# Altium PCB uarttors485_1codeic.PcbDoc
Units mil, origin at the board's own origin, x right, y up, seen from the top; angles counter-clockwise.
Board outline 2086.61 x 1633.86 mil, 2 copper layers (Top Layer, Bottom Layer); 19 components, 11 nets, 50 pads, 0 vias.
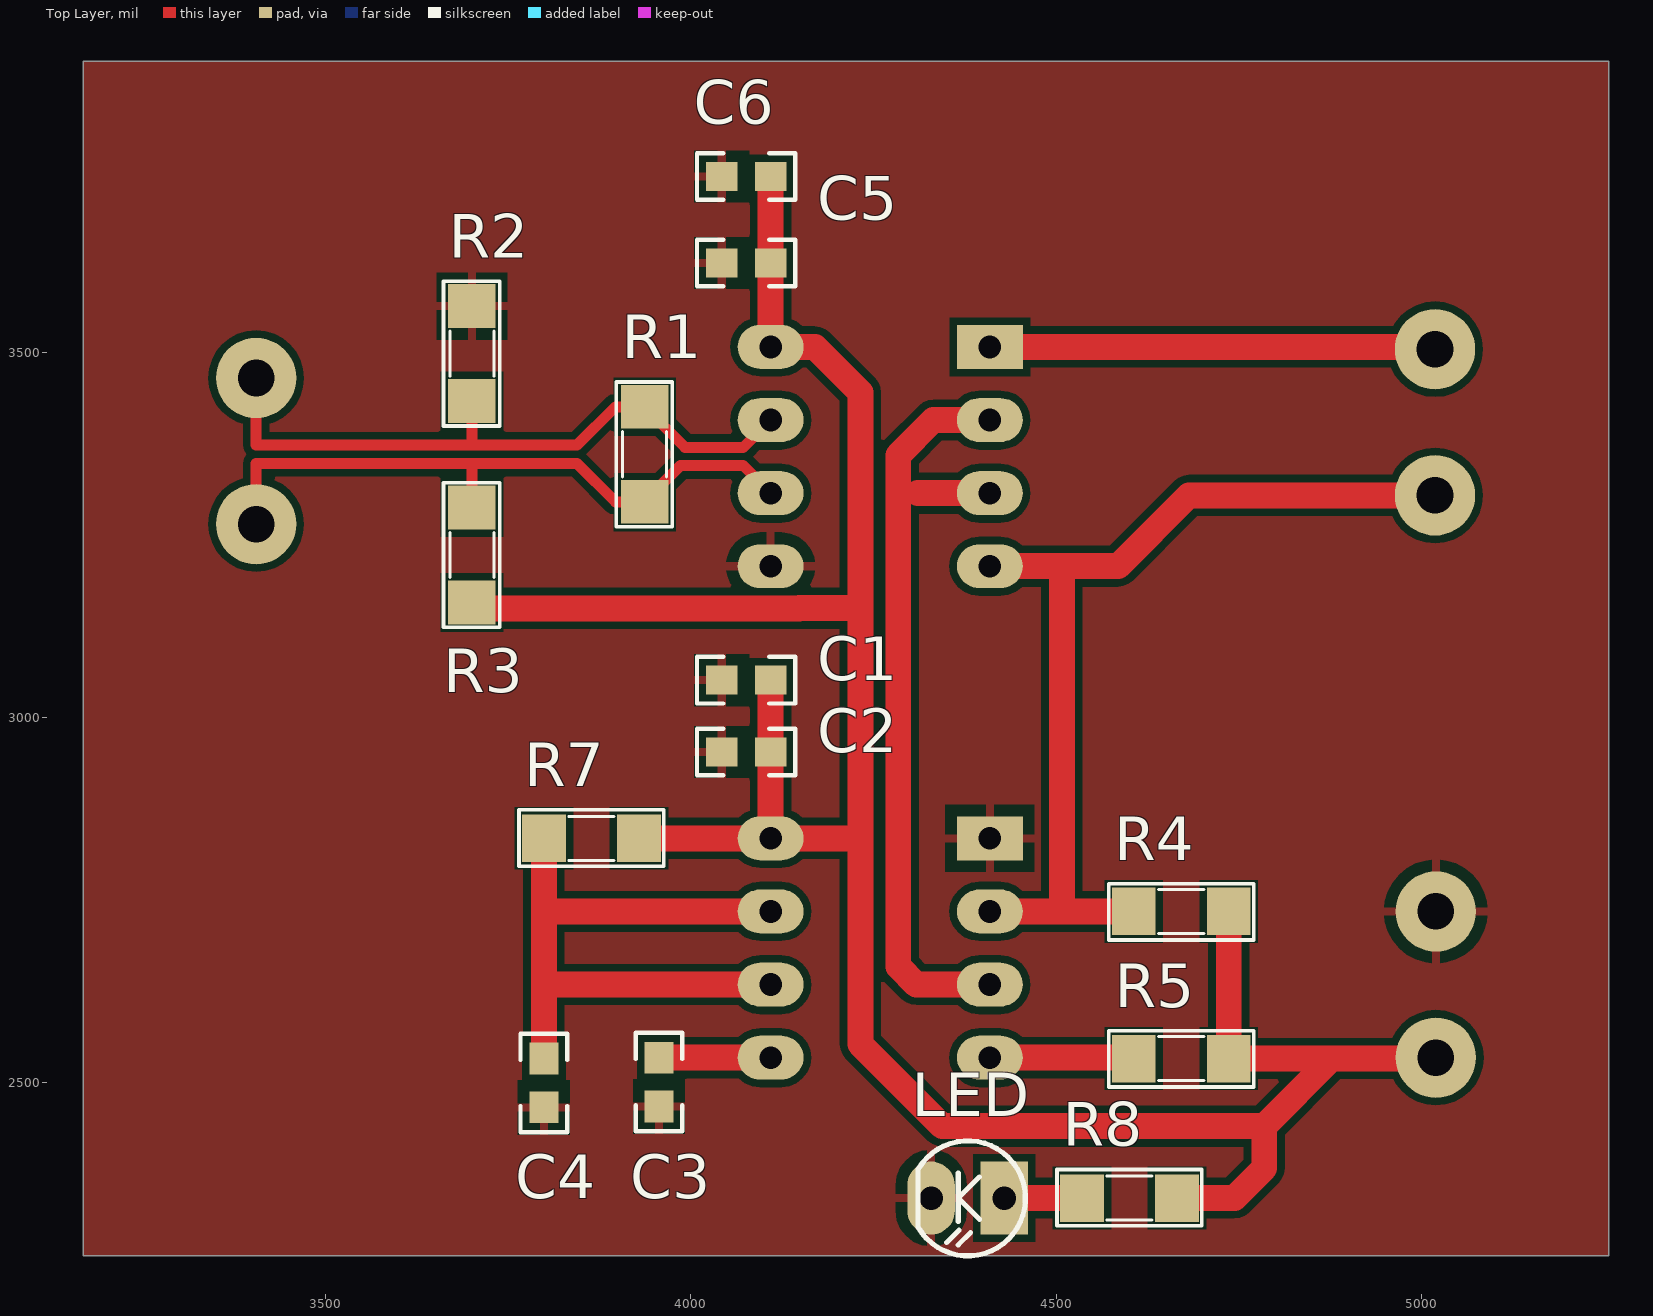
[diagram p0: Top Layer view]
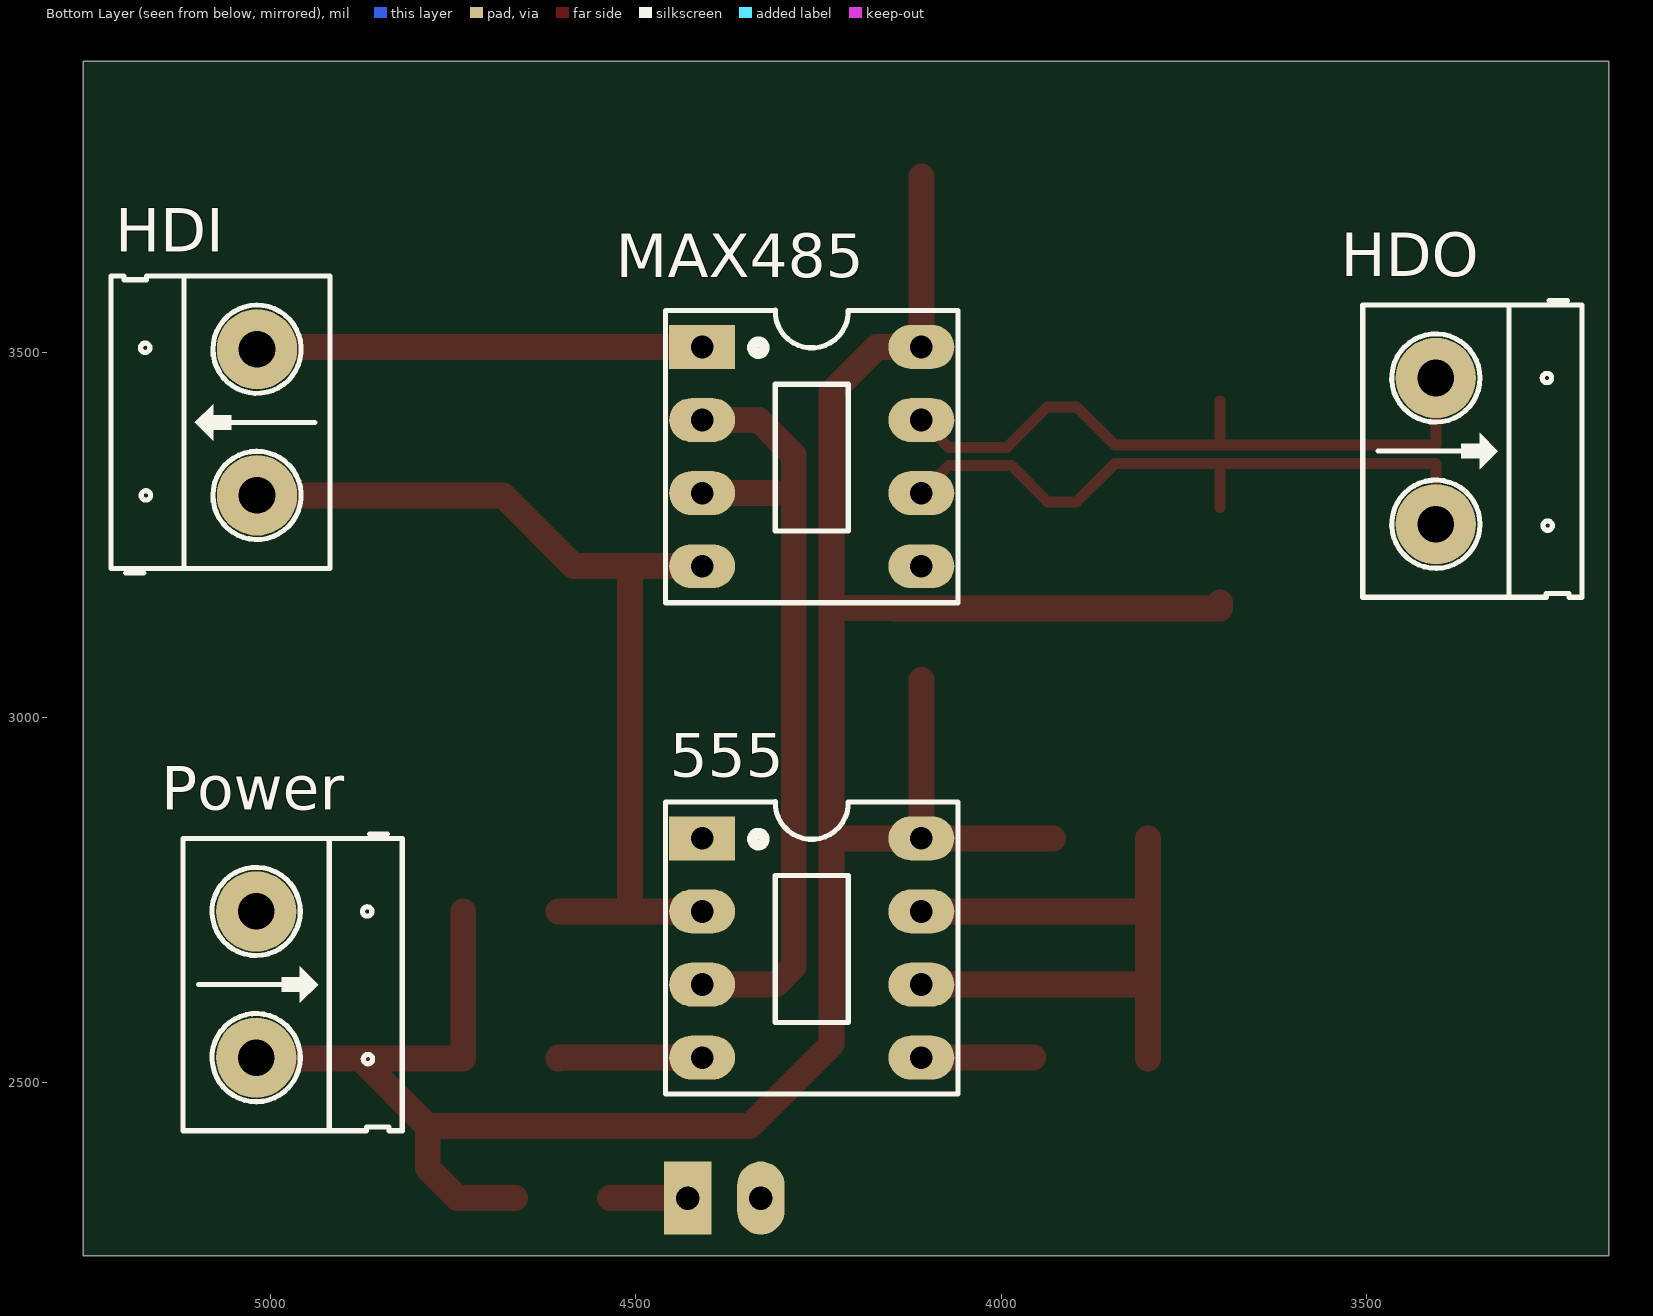
[diagram p1: Bottom Layer view, seen from below]
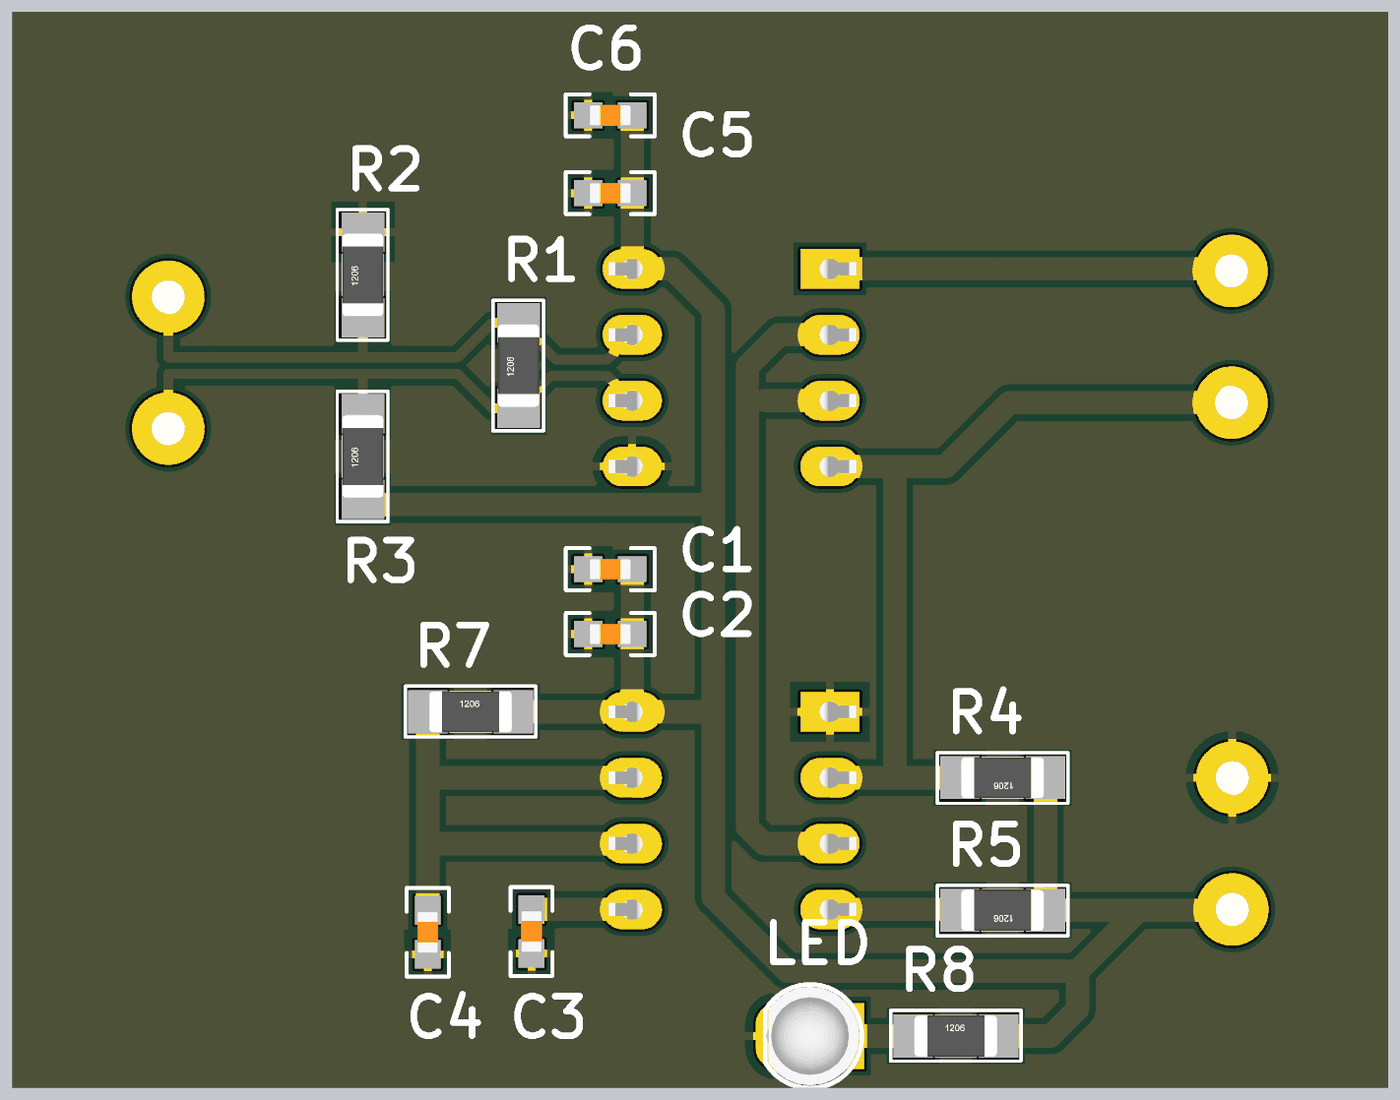
[diagram p2: 3D render of the assembled board from above, using the file's embedded part models]
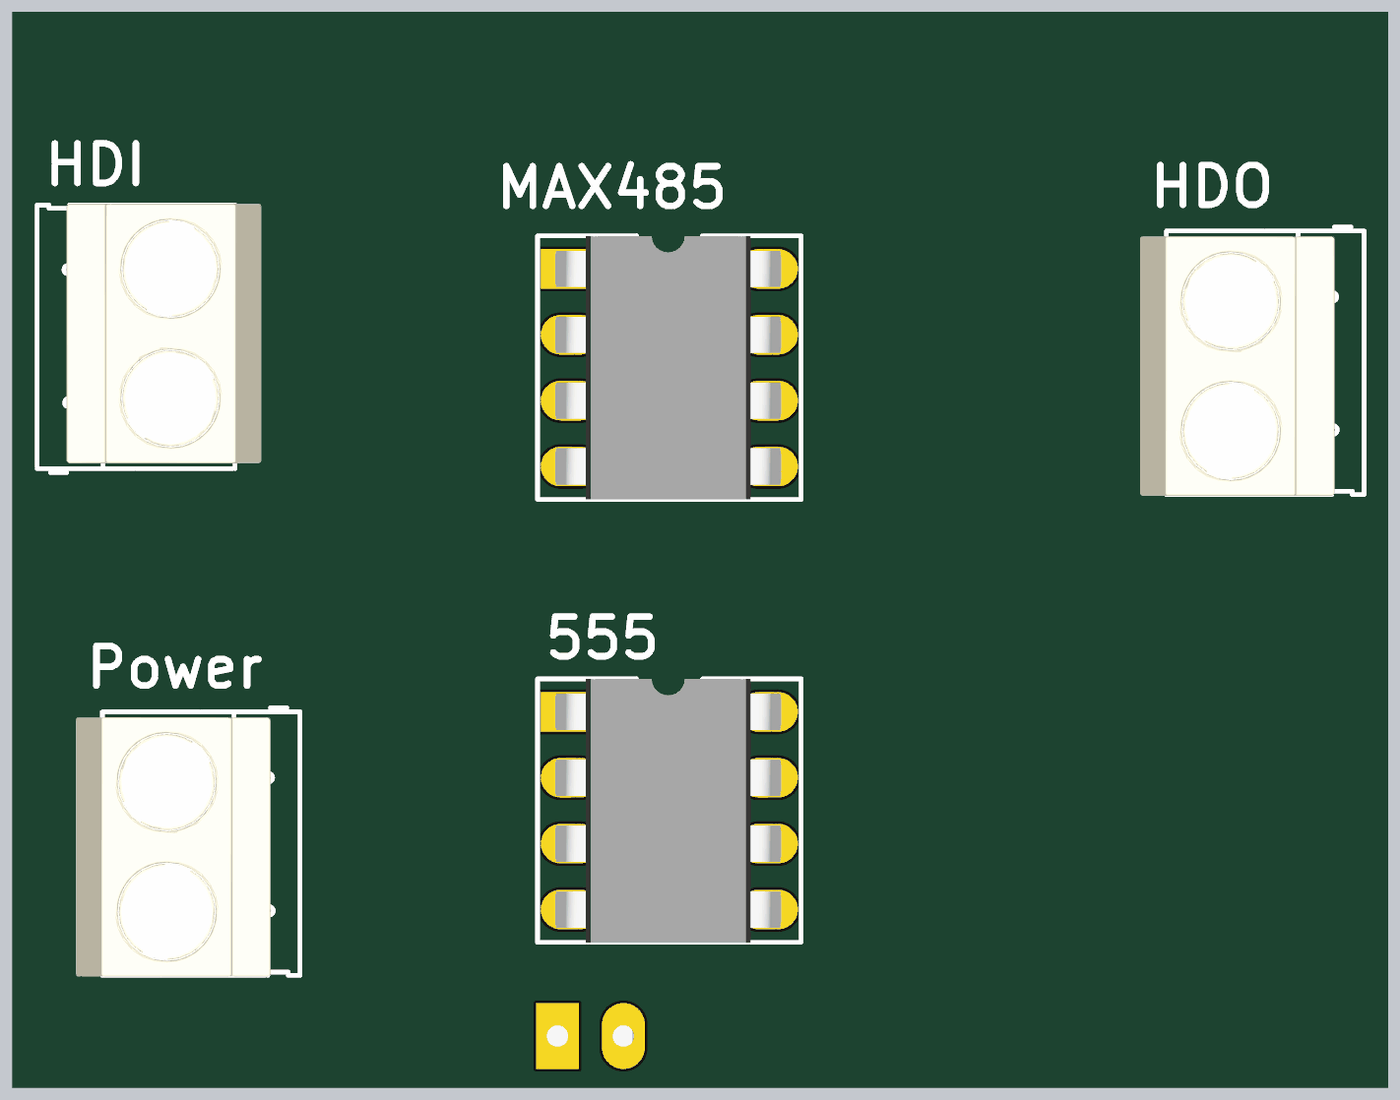
[diagram p3: 3D render of the assembled board from below, using the file's embedded part models]

## Layer stack, top to bottom
Top Solder: solder mask 0.4, Solder Resist, Dk 3.5
Top Layer: signal copper 1.4
Dielectric 1: dielectric 12.6, FR-4, Dk 4.8
Bottom Layer: signal copper 1.4
Bottom Solder: solder mask 0.4, Solder Resist, Dk 3.5

## Board outline
3169.29,3897.64 5255.91,3897.64 5255.91,2263.78 3169.29,2263.78

## Design rules (kind name [scope] priority, off if disabled: settings)
Clearance Clearance_4 [InNamedPolygon('Top Layer-No Net')] p1: gap=10 ignorepadtopadclearanceinfootprint=FALSE except(0: Arc-Hole Track-Hole SMDPad-Hole THPad-Hole Via-Hole Fill-Hole Poly-Hole Region-Hole Text-Hole)
Clearance Clearance_3 [InNamedPolygon('Top Layer-No Net')] p2: gap=10 ignorepadtopadclearanceinfootprint=FALSE except(0: Arc-Hole Track-Hole SMDPad-Hole THPad-Hole Via-Hole Fill-Hole Poly-Hole Region-Hole Text-Hole; 20: Arc-Fill Arc-Poly Arc-Region Track-Fill Track-Poly Track-Region THPad-Fill THPad-Poly THPad-Region)
Clearance Clearance_2 [InNamedPolygon('Top Layer-No Net')] p3: gap=10 ignorepadtopadclearanceinfootprint=FALSE except(0: Arc-Hole Track-Hole SMDPad-Hole THPad-Hole Via-Hole Fill-Hole Poly-Hole Region-Hole Text-Hole; 20: Arc-Fill Arc-Poly Arc-Region Track-Fill Track-Poly Track-Region THPad-Fill THPad-Poly THPad-Region)
Clearance Clearance_1 [InNamedPolygon('Top Layer-No Net')] p4: gap=10 ignorepadtopadclearanceinfootprint=FALSE except(0: Arc-Hole Track-Hole SMDPad-Hole THPad-Hole Via-Hole Fill-Hole Poly-Hole Region-Hole Text-Hole; 20: Arc-Fill Arc-Poly Arc-Region Track-Fill Track-Poly Track-Region THPad-Fill THPad-Poly THPad-Region)
Clearance [All] p5: gap=10 ignorepadtopadclearanceinfootprint=FALSE except(0: Arc-Hole Track-Hole SMDPad-Hole THPad-Hole Via-Hole Fill-Hole Poly-Hole Region-Hole Text-Hole; 20: Arc-Fill Arc-Poly Arc-Region Track-Fill Track-Poly Track-Region THPad-Fill THPad-Poly THPad-Region)
DiffPairsRouting [All] p1: maxlimit=10 minlimit=10 mostfreqgap=10 toplayer_minwidth=15 toplayer_maxwidth=15 toplayer_prefwidth=15 bottomlayer_minwidth=15 bottomlayer_maxwidth=15 bottomlayer_prefwidth=15 maxuncoupledlength=500
PolygonConnect PolygonConnect_5 [All vs IsNamedPolygon('Top Layer-No Net')] p1: connectstyle=Relief reliefconductorwidth=11.81 reliefentries=4 polygonreliefangle="90 Angle" airgapwidth=15.75
PolygonConnect PolygonConnect_4 [All vs IsNamedPolygon('Top Layer-No Net')] p2: connectstyle=Relief reliefconductorwidth=10 reliefentries=4 polygonreliefangle="90 Angle" airgapwidth=11.81
PolygonConnect PolygonConnect_3 [All vs IsNamedPolygon('Top Layer-No Net')] p3: connectstyle=Relief reliefconductorwidth=11.81 reliefentries=4 polygonreliefangle="90 Angle" airgapwidth=15.75
PolygonConnect PolygonConnect_2 [All vs IsNamedPolygon('Top Layer-No Net')] p4: connectstyle=Relief reliefconductorwidth=11.81 reliefentries=4 polygonreliefangle="90 Angle" airgapwidth=15.75
PolygonConnect PolygonConnect_1 [All vs IsNamedPolygon('Top Layer-No Net')] p5: connectstyle=Relief reliefconductorwidth=11.81 reliefentries=4 polygonreliefangle="90 Angle" airgapwidth=15.75
PolygonConnect [All] p6: connectstyle=Relief reliefconductorwidth=10 reliefentries=4 polygonreliefangle="90 Angle" airgapwidth=10
RoutingVias [All] p1: holewidth=28 width=50 viastyle="Through Hole" minholewidth=28 minwidth=50 maxholewidth=28 maxwidth=50
SolderMaskExpansion [All] p1: expansion=4
Width [All] p1: maxlimit=43.31 minlimit=35.43 preferedwidth=39.37
29 further rules are at their usual default settings.

## Classes and differential pairs
differential pair class RS485DIFF: ""
component class uartto485: 555 C3 C4 HDI HDO MAX485 R1 R2 R3 R4 R5 R7
component class power: C1 C2 C5 C6 LED Power R8
differential pair "": +_P -_N

## Components (designator, comment, footprint, x,y, rotation, side; value= is the part's Value field where it differs from the comment)
555 "LM555" DIP8/W0.3 4409.45,2834.65 r270 bottom
C1 "22uF" "CAPC-0603 (1608)" 4075.98,3051.18 r0 top value=33p/50V
C2 "22uF" "CAPC-0603 (1608)" 4075.98,2952.76 r0 top value=33p/50V
C3 "10uF" "CAPC-0603 (1608)" 3956.69,2501.18 r90 top value=33p/50V
C4 "0.01uF" "CAPC-0603 (1608)" 3799.21,2500 r90 top value=33p/50V
C5 "22uF" "CAPC-0603 (1608)" 4075.98,3622.05 r0 top value=33p/50V
C6 "22uF" "CAPC-0603 (1608)" 4075.98,3740.16 r0 top value=33p/50V
HDI "Header 2_1" HED2 5018.5,3303.94 r90 bottom value="Header 2"
HDO "Header 2_1" HED2 3405.51,3464.57 r270 bottom value="Header 2"
LED "LED" LED-3 4429.13,2342.52 r180 top value="LED 3 ly Single Colour"
MAX485 "MAX485" DIP8/W0.3 4409.45,3507.09 r270 bottom
Power "Header 2_1" HED2 5019.69,2734.65 r270 bottom value="Header 2"
R1 "120" SM-RES-1206 3937.01,3295.2 r90 top value="R1/4W - 1K"
R2 "20k" SM-RES-1206 3700.79,3432.99 r90 top value="R1/4W - 1K"
R3 "20k" SM-RES-1206 3700.79,3157.4 r90 top value="R1/4W - 1K"
R4 "10k" SM-RES-1206 4736.3,2734.65 r180 top value="R1/4W - 1K"
R5 "1k" SM-RES-1206 4736.3,2533.46 r180 top value="R1/4W - 1K"
R7 "6.8k" SM-RES-1206 3799.21,2834.65 r0 top value="R1/4W - 1K"
R8 "1k" SM-RES-1206 4535.35,2342.52 r0 top value="R1/4W - 1K"

## Footprints (in the part's own frame and the unit in brackets; to place one, negate y for a bottom-side part, rotate by r counter-clockwise, add the part's x,y. Pads: shape width x height; smd on the part's side, far side on the other; paste and mask are expansions set on the pad)
"CAPC-0603 (1608)" [mm] "Resistor, Chip; 1.60 mm L X 0.80 mm W X 0.50 mm H body"
  rect 1.1x1 smd mask+0.1: 1(-0.85,0) 2(0.85,0)
  silkscreen extent -1.71,-0.81 1.71,0.81, body extent -0.8,-0.4 0.8,0.4, height 0.6
DIP8/W0.3 [mil] "8 PIN, W 300mil, Pin to pin 100mil"
  rect 60x90 hole 31: 1(0,0)
  oval 60x90 hole 31: 2(100,0) 3(200,0) 4(300,0) 5(300,300) 6(200,300) 7(100,300) 8(0,300)
  silkscreen extent -50,-50 350,350, body extent -50,-40 350,336, height 201
HED2 [mil] "Header 2, 2 pin, hight 300mil, Pin to Pin 200, Colour Green"
  round 110 hole 50: 1(0,0) 2(200,0)
  silkscreen extent -106,-100 300,200, body extent -92,-140 302,155, height 394
LED-3 [mil] "LED 2 PIN, 3ly Only colour"
  rect 65x100 hole 32: 1(0,0)
  oval 65x100 hole 32: 2(100,0)
  silkscreen extent -29,-78 118,79, body extent -25,-75 113,75, height 217
SM-RES-1206 [mil]
  rect 60x65 smd: 1(0,0) 2(130,0)
  silkscreen extent -34,-38 164,39, body extent 2,-31 128,32, height 40

## Part data
555: "Timer"
C1 C2 C3 C4 C5 C6: library part 0603N330J500CT, "CAP CER 33pF 50V 5%  0603", MPN="CL10C330JB8NNNC, 0603N330J500CT", Category=CAPACITOR, CompanyID=VT-01106, PinCount=2, Solder=SMT
HDI HDO Power: "Header, 2-Pin", Manufacturer="Generic Components", Class=Connector
LED: "LED Single colour Green and Red"
MAX485: "RS232 - RS485 (Same sn75176)"
R1 R2 R3 R4 R5 R7 R8: library part R, "Resistor 1/4W"

## Nets (pads, with @x,y where several pads share a name; then routed paths per layer and width w, separated by ;. In a path a pad name is that pad's centre, name@x,y a point inside that pad or via, vN(x,y) a via of type N, cw(c..) or ccw(c..) an arc to the next point about the centre after c; other vN are vias at no path point)
_N: HDO.1 MAX485.7 R1.2 R2.1 | length 916.4
  Top Layer w15: HDO.1 3405.51,3372.7 3700.79,3372.7 ; R2.1 3700.79,3372.7 ; MAX485.7 4071.95,3369.59 3992.62,3369.59 R1.2 3897.01,3425.2 3844.51,3372.7 3700.79,3372.7
_P: HDO.2 MAX485.6 R1.1 R3.2 | length 905.1
  Top Layer w15: HDO.2 3405.51,3347.7 3700.79,3347.7 ; R3.2 3700.79,3347.7 ; MAX485.6 4071.95,3344.59 3986.4,3344.59 R1.1 3897.01,3295.2 3844.51,3347.7 3700.79,3347.7
GND: 555.1 C1.1 C2.1 C3.1 C4.1 C5.1 C6.1 LED.2 MAX485.5 Power.1 R2.2
Net555_2: 555.2 HDI.1 MAX485.4 R4.2 | length 1318.5
  Top Layer w35.43: 555.2 4507.87,2734.65 ; MAX485.4 4507.87,3207.09 ; R4.2 4507.87,2734.65 ; HDI.1 4681.89,3303.94 4585.04,3207.09 4507.87,3207.09 ; 4507.87,2734.65 4507.87,3207.09
Net555_3: 555.3 MAX485.2 MAX485.3 | length 1078.8
  Top Layer w35.43: 4311.02,3307.09 MAX485.3 ; 555.3 4308.92,2634.65 4284.12,2659.44 4284.12,3358.93 4332.28,3407.09 MAX485.2
Net555_4: 555.4 R5.2 | length 197.3
  Top Layer w35.43: 555.4 4605.12,2534.65 R5.2
Net555_5: 555.5 C3.2 | length 152.8
  Top Layer w35.43: C3.2 555.5
Net555_6: 555.6 555.7 C4.2 R7.1 | length 923.6
  Top Layer w35.43: C4.2 3799.21,2637.8 ; R7.1 3799.21,2736.22 ; 555.6 3802.36,2634.65 3799.21,2637.8 ; 555.7 3800.79,2734.65 3799.21,2736.22 ; 3799.21,2637.8 3799.21,2736.22
NetHDI_2: HDI.2 MAX485.1 | length 610.4
  Top Layer w35.43: MAX485.1 5015.35,3507.09 HDI.2
NetLED_1: LED.1 R8.1 | length 106.2
  Top Layer w35.43: LED.1 R8.1
VCC: 555.8 C1.2 C2.2 C5.2 C6.2 MAX485.8 Power.2 R3.1 R4.1 R5.1 R7.2 R8.2 | length 3741.7
  Top Layer w35.43: R3.1 3700.79,3149.37 4148.36,3149.37 4148.59,3149.61 4232.28,3149.61 ; R7.2 555.8 ; C1.2 C2.2 555.8 ; C6.2 C5.2 MAX485.8 4170.08,3507.09 4232.28,3444.88 4232.28,3149.61 ; R8.2 4744.09,2342.52 4784.88,2383.31 4784.88,2440.94 ; R4.1 R5.1 4877.4,2533.46 ; Power.2 5018.5,2533.46 4877.4,2533.46 ; 555.8 4232.28,2834.65 ; 4232.28,2834.65 4232.28,3149.61 ; 4232.28,2834.65 4232.28,2553.15 4344.49,2440.94 4784.88,2440.94 ; 4784.88,2440.94 4877.4,2533.46

## Polygon pours and split planes (outlines as drawn)
GND on Top Layer "Top Layer-No Net" (solid, pour order 4): 3169.29,3897.64 5255.91,3897.64 5255.91,2263.78 3169.29,2263.78